# EAGLE board Sensor_Unit_Board (EAGLE 6.4)
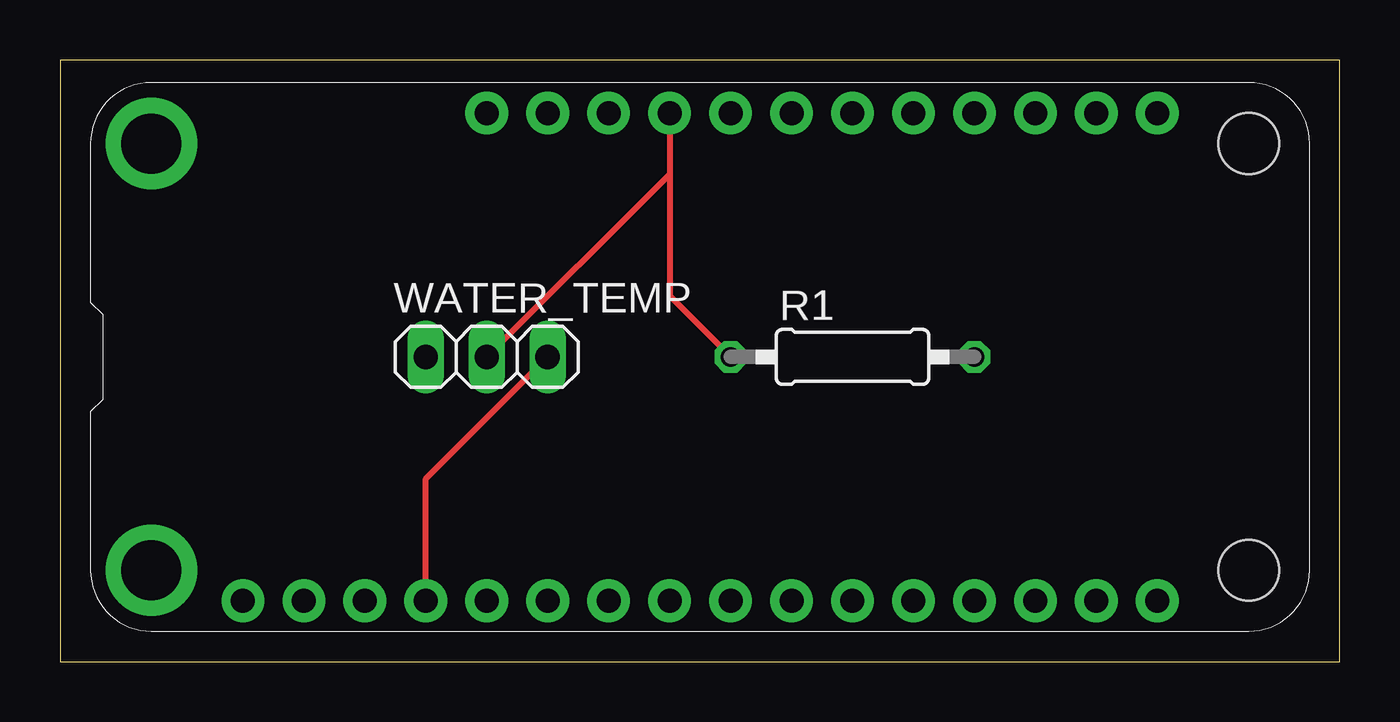
[diagram p0: board, top side]
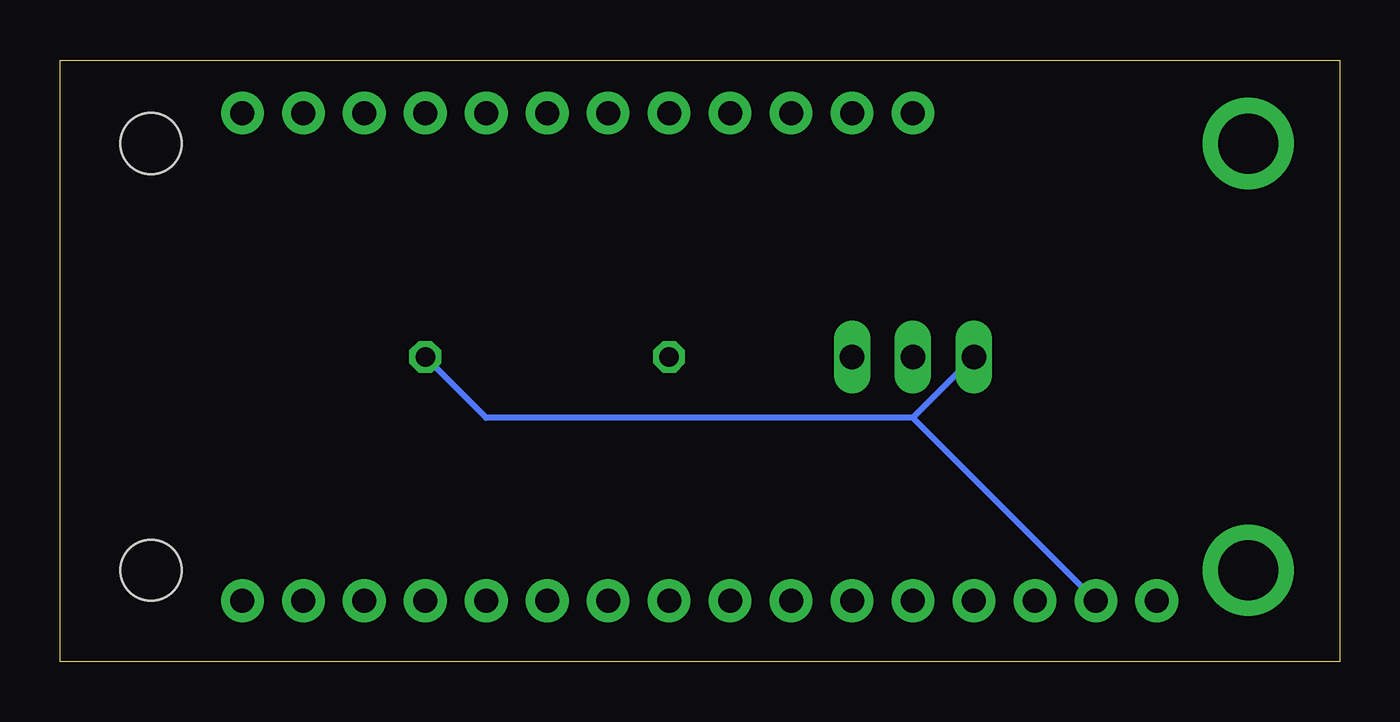
[diagram p1: board, bottom side, seen from below]

Size 53.32 x 25.07 mm. Coordinates in mm from the lower left corner, seen from the top.
Outline: 0,0 53.32,0 53.32,25.07 0,25.07 0,0
Copper layers (1*16): Top 0.035mm / dielectric 1.5mm / Bottom 0.035mm
Design rules "default": minimum track width 10mil, minimum drill 24mil, track to track 8mil, track to pad 8mil, pad to pad 8mil, via to via 8mil, smd to smd 8mil, copper to edge 40mil, drill to drill 8mil, minimum pad ring 10mil, minimum via ring 8mil, stop-mask expansion 4mil, vias tented up to drill 0mil, thermal gap 10mil

## Footprints (pad centres in the part's own frame; a part is rotated, then mirrored left to right if it is on the bottom)
FEATHERWING_DIM = drill 1 pad 1.778: 1 6.35,1.27; 2 8.89,1.27; 3 11.43,1.27; 4 13.97,1.27; 5 16.51,1.27; 6 19.05,1.27; 7 21.59,1.27; 8 24.13,1.27; 9 26.67,1.27; 10 29.21,1.27; 11 31.75,1.27; 12 34.29,1.27; 13 36.83,1.27; 14 39.37,1.27; 15 41.91,1.27; 16 44.45,1.27; 17 44.45,21.59; 18 41.91,21.59; 19 39.37,21.59; 20 36.83,21.59; 21 34.29,21.59; 22 31.75,21.59; 23 29.21,21.59; 24 26.67,21.59; 25 24.13,21.59; 26 21.59,21.59; 27 19.05,21.59; 28 16.51,21.59 | drill 2.5 pad 3.81: P$1 2.54,20.32; P$2 2.54,2.54 | hole 2.54: 48.26,20.32; 48.26,2.54
0207/10 = drill 0.813 octagon: 1 -5.08,0; 2 5.08,0
1X03 = drill 1.016 long: 1 -2.54,0; 2 0,0; 3 2.54,0

## Placement (x,y rotation side)
MS1  FEATHERWING_NODIM  [FEATHERWING_DIM]  1.27,1.27 0 top
R1  [0207/10]  33.02,12.7 0 top
WATER_TEMP  [1X03]  17.78,12.7 0 top

## Library data of the parts
MS1 = adafruit
R1 = rcl
WATER_TEMP = pinhead

## Nets
GND: MS1.4 WATER_TEMP.3
N$4: MS1.25 R1.1 WATER_TEMP.2
VCC: MS1.2 R1.2 WATER_TEMP.1

## Tracks (layer width: path | path; a pad name or v marks a point on that pad's centre or on a via)
GND
  Top 0.254: WATER_TEMP.3 15.24,7.62 MS1.4
N$4
  Top 0.254: R1.1 25.4,15.24 25.4,20.32 | MS1.25 25.4,20.32 | 25.4,20.32 WATER_TEMP.2
VCC
  Bottom 0.254: R1.2 35.56,10.16 17.78,10.16 | WATER_TEMP.1 17.78,10.16 | 17.78,10.16 MS1.2